# EAGLE board RJ_IGVC_Estop (EAGLE 9.3.1)
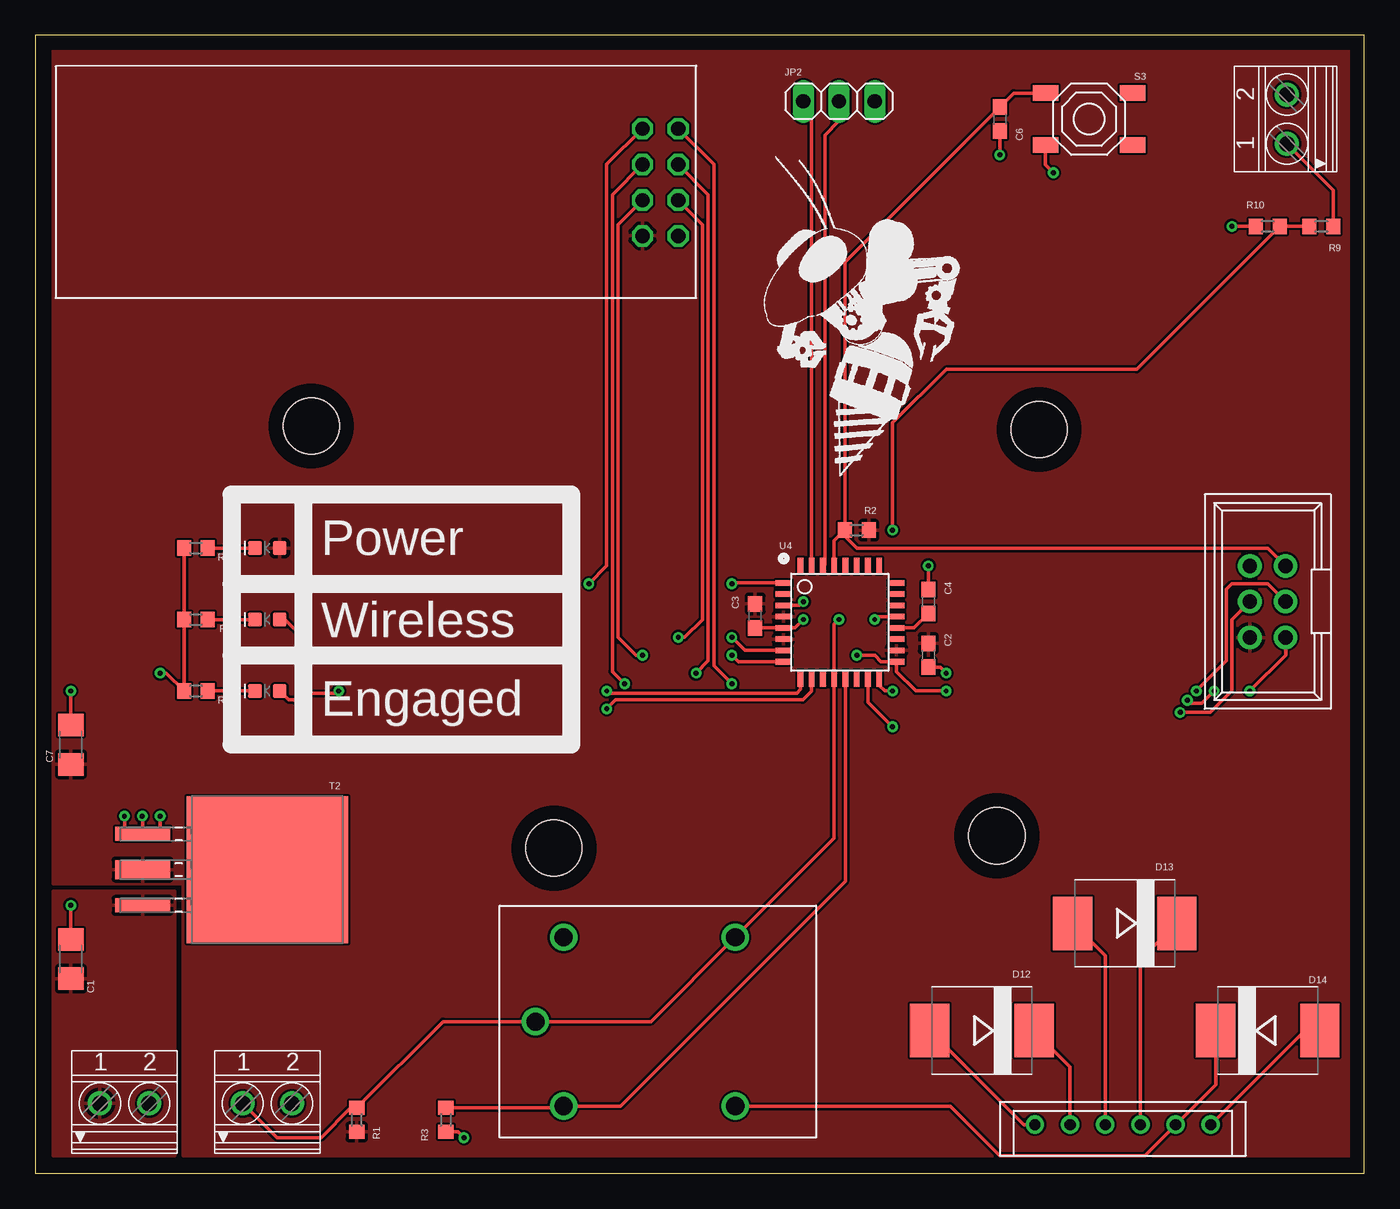
[diagram p0: board, top side]
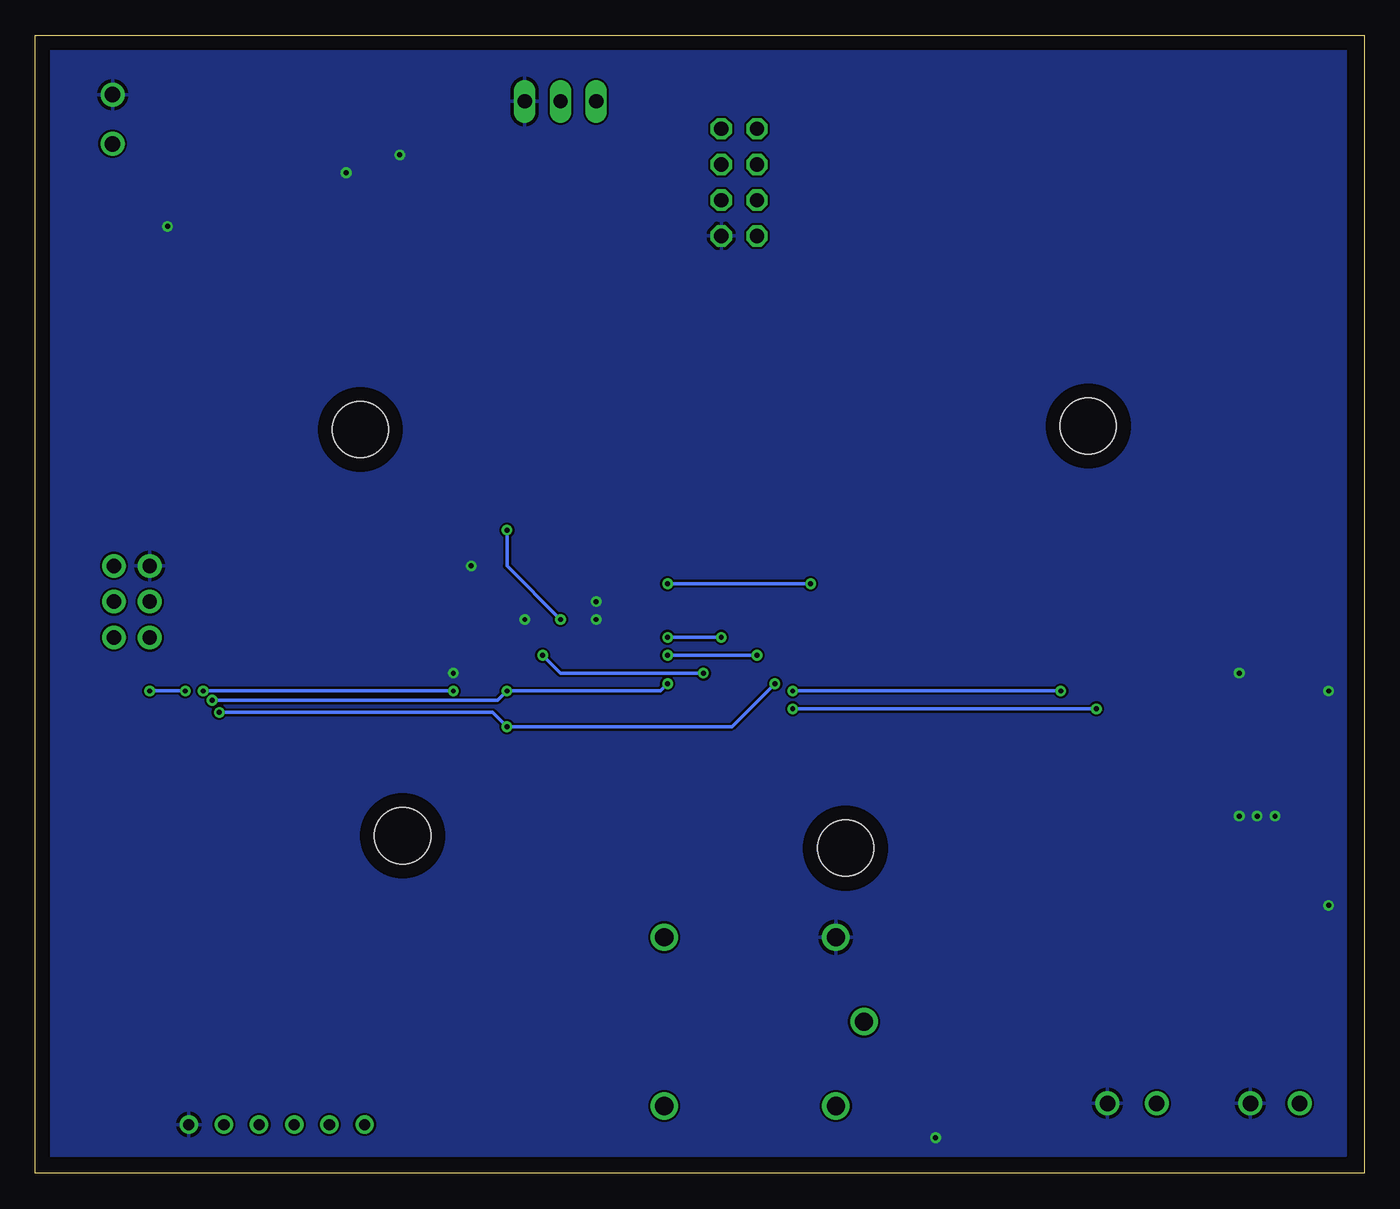
[diagram p1: board, bottom side, seen from below]

Size 94.5 x 80.9 mm. Coordinates in mm from the lower left corner, seen from the top.
Outline: 0,0 94.5,0 94.5,80.9 0,80.9 0,0
Copper layers (1*16): Top 0.035mm / dielectric 1.5mm / Bottom 0.035mm
Design rules "default *": minimum track width 6mil, minimum drill 0.35mm, track to track 6mil, track to pad 6mil, pad to pad 6mil, via to via 6mil, smd to smd 6mil, copper to edge 40mil, drill to drill 6mil, minimum pad ring 10mil, minimum via ring 8mil, stop-mask expansion 4mil, vias tented up to drill 0mil, thermal gap 10mil
Holes 4 mm at 36.88,23.12 68.38,24 19.63,53.12 71.38,52.88

## Footprints (pad centres in the part's own frame; a part is rotated, then mirrored left to right if it is on the bottom)
C1206 = smd 1.6 x 1.8: 1 -1.4,0; 2 1.4,0
C0603 = smd 1.1 x 1: 1 -0.85,0; 2 0.85,0
LED-0603 = smd 1 x 1: A -0.877,0; C 0.877,0
SMC = smd 2.8 x 3.8: A 3.7,0; C -3.7,0
1X03 = drill 1.016 long: 1 -2.54,0; 2 0,0; 3 2.54,0
2X3SHROUDED = drill 1.02 pad 1.676: !RESET -2.54,1.27; +5V 2.554,-1.27; GND -2.54,-1.27; MISO 2.54,1.27; MOSI 0,-1.27; SCK 0,1.27
R0603 = smd 1 x 1.1: 1 -0.85,0; 2 0.85,0
SW4-SMD-5.2X5.2X1.5MM = smd 1.8 x 1.1: 1 -3.1,1.85; 2 3.1,1.85; 3 3.1,-1.85; 4 -3.1,-1.85
D2PAK/A = smd 0.991 x 3.912: 1 -2.54,-8.877; 3 2.54,-8.877 | smd 1.346 x 3.912: 2 0,-8.877 | smd 10.465 x 11.455: 4 0,0
ATMEGA328P-AUR = smd 1.15 x 0.4: 1 -3.946,2.603; 2 -3.955,1.803; 3 -3.955,1.003; 4 -3.955,0.203; 5 -3.955,-0.597; 6 -3.955,-1.397; 7 -3.955,-2.197; 8 -3.955,-2.997; 17 4.085,-2.997; 18 4.085,-2.197; 19 4.085,-1.397; 20 4.085,-0.597; 21 4.085,0.203; 22 4.085,1.003; 23 4.085,1.803; 24 4.085,2.603 | smd 0.4 x 1.15: 9 -2.743,-4.21; 10 -1.943,-4.21; 11 -1.143,-4.207; 12 -0.343,-4.21; 13 0.457,-4.21; 14 1.257,-4.207; 15 2.057,-4.207; 16 2.857,-4.207; 25 2.857,3.813; 26 2.057,3.813; 27 1.257,3.813; 28 0.457,3.811; 29 -0.343,3.811; 30 -1.143,3.813; 31 -1.943,3.811; 32 -2.743,3.811
G5LE-14 = drill 1.3: P$1 4.55,14.25; P$2 16.75,14.25; P$3 4.55,2.25; P$4 2.55,8.25; P$5 16.75,2.25
1751248 = drill 1.1 pad 1.7: 1 -1.75,-0.1; 2 1.75,-0.1
NRF24L01+PA+LNA = drill 1.016 octagon: CE 21.59,-0.68; CSN 19.05,-0.68; GND 21.59,-3.22; IRQ 19.05,4.4; MISO 21.59,4.4; MOSI 19.05,1.86; SCK 21.59,1.86; VCC 19.05,-3.22
B6BEHALFSN = drill 0.8: X-1 2.5,2.2; X-2 5,2.2; X-3 7.5,2.2; X-4 10,2.2; X-5 12.5,2.2; X-6 15,2.2

## Placement (x,y rotation side)
C1  10uF  [C1206]  2.54,15.24 90 top
C2  0.1uF  [C0603]  63.5,36.83 270 top
C3  0.1uF  [C0603]  51.18,39.62 270 top
C4  0.1uF  [C0603]  63.5,40.64 90 top
C6  0.1uF  [C0603]  68.58,74.93 270 top
C7  10uF  [C1206]  2.54,30.48 90 top
D1  Green  [LED-0603]  16.51,39.37 180 top
D2  Green  [LED-0603]  16.51,44.45 180 top
D3  Green  [LED-0603]  16.51,34.29 180 top
D12  S10M-TP  [SMC]  67.31,10.16 180 top
D13  S10M-TP  [SMC]  77.47,17.78 180 top
D14  S10M-TP  [SMC]  87.63,10.16 0 top
JP2  Serial  [1X03]  57.15,76.2 0 top
PROG  ICSP Connector  [2X3SHROUDED]  87.63,40.64 270 top
R1  10k  [R0603]  22.86,3.81 90 top
R2  10k  [R0603]  58.42,45.72 0 top
R3  10k  [R0603]  29.21,3.81 90 top
R4  1k  [R0603]  11.43,39.37 0 top
R5  1k  [R0603]  11.43,44.45 0 top
R6  1k  [R0603]  11.43,34.29 0 top
R9  4.7k  [R0603]  91.44,67.31 180 top
R10  750  [R0603]  87.63,67.31 180 top
S3  SKQGADE010  [SW4-SMD-5.2X5.2X1.5MM]  74.93,74.93 0 top
T2  LD1086D2M33TR  [D2PAK/A]  16.51,21.59 270 top
U4  ATMEGA328P-AUR  [ATMEGA328P-AUR]  57.15,39.37 0 top
U$1  G5LE-14  [G5LE-14]  33.02,2.54 0 top
U$2  [ROBOBUZZ_1.2X]  57.15,49.53 0 top
X2  Power  [1751248]  6.35,5.08 0 top
X3  Button In  [1751248]  16.51,5.08 0 top
X4  E-Stop Signal In  [1751248]  88.9,74.93 90 top
X5  [NRF24L01+PA+LNA]  24.13,69.85 0 top
X6  B6B-EH-A(LF)(SN)  [B6BEHALFSN]  68.58,1.27 0 top

## Library data of the parts
C1-C4 C7 = rcl; SPICEPREFIX: C
C6 R1 R3-R6 R9 R10 = resistor
D1-D3 = SparkFun-LED; PROD_ID: DIO-09003
D12-D14 = IGVC-Discrete
JP2 = pinhead
PROG U4 = lcd-buzzer
R2 = rcl; SPICEPREFIX: R
S3 = rgb-led; MPN: SKQGADE010
T2 = transistor; MANUFACTURER_PART_NUMBER: LD1086D2M33TR; VENDOR: STMicroelectronics
U$1 = IGVC-Misc
U$2 = RoboJackets-Aesthetics
X2-X4 = con-phoenix-350; OC_FARNELL: unknown; OC_NEWARK: unknown
X5 X6 = IGVC-Connector

## Nets
!RESET: C6.1 PROG.!RESET R2.1 S3.1 U4.29
+3V3: C2.1 C3.1 C7.1 D2.A PROG.+5V R1.1 R2.2 T2.2 U4.4 U4.6 U4.18 X5.VCC
+24V: D12.A X6.X-1
BUTTON_LED: D1.A U4.9
CE: U4.7 X5.CE
CSN: U4.8 X5.CSN
DIODE_TO_GREEN: D12.C X6.X-2
DIODE_TO_INTER: D13.C X6.X-4
GND: C1.2 C2.2 C3.2 C4.2 C6.2 C7.2 D14.A JP2.3 PROG.GND R3.1 R4.1 R5.1 R6.1 R10.2 S3.4 T2.1 U4.3 U4.5 U4.21 U$1.P$1 X2.2 X3.2 X4.2 X5.GND X6.X-6
IN: R1.2 R9.2 R10.1 U4.12 U$1.P$2 U$1.P$4 X3.1
IRQ: U4.1 X5.IRQ
MISO: PROG.MISO U4.16 X5.MISO
MOSI: PROG.MOSI U4.15 X5.MOSI
MOTOR_POWER: D13.A X6.X-3
N$2: D2.C R5.2
N$3: D1.C R4.2
N$4: D3.C R6.2
N$6: R9.1 X4.1
N$9: C4.1 U4.20
OUT: R3.2 U4.13 U$1.P$3
RX: JP2.2 U4.30
SCK: PROG.SCK U4.17 X5.SCK
SOLENOID_TRIG: D14.C U$1.P$5 X6.X-5
TX: JP2.1 U4.31
V_IN: C1.1 T2.3 X2.1
WIRELESS_LED: D3.A U4.10

## Tracks (layer width: path | path; a pad name or v marks a point on that pad's centre or on a via)
!RESET
  Top 0.254: U4.29 56.81,44.96 R2.1 | R2.1 57.57,64.77 C6.1 69.58,76.78 S3.1 | R2.1 57.57,45.3 58.42,44.45 87.63,44.45 PROG.!RESET
+3V3
  pour Top: 1.27,20.57 10.54,20.57 10.54,1.27 93.98,1.27 93.98,80.01 1.27,80.01
+24V
  Top 0.254: D12.A 70.3,3.47 X6.X-1
BUTTON_LED  (via drill 0.35)
  Top 0.254: U4.9 54.41,34.4 54.15,34.15 40.78,34.15 v40.64,34.29 | D1.A 17.78,39.37 19.05,38.1 19.05,34.67 19.58,34.15 21.45,34.15 v21.59,34.29
  Bottom 0.254: v21.59,34.29 v40.64,34.29
CE  (via drill 0.35)
  Top 0.254: X5.CE 47.45,67.44 47.45,39.37 46.18,38.1 v45.72,38.1 | U4.7 50.46,37.17 v49.53,38.1
  Bottom 0.254: v49.53,38.1 v45.72,38.1
CSN  (via drill 0.35)
  Top 0.254: X5.CSN 41.45,67.44 41.45,38.1 42.72,36.83 v43.18,36.83 | U4.8 49.99,36.37 v49.53,36.83
  Bottom 0.254: v49.53,36.83 v43.18,36.83
DIODE_TO_GREEN
  Top 0.254: D12.C 73.58,7.59 X6.X-2
DIODE_TO_INTER
  Top 0.254: D13.C 78.58,15.19 X6.X-4
GND  (via drill 0.35)
  Top 0.254: v8.89,35.56 9.31,35.56 R6.1 R4.1 R5.1 | C1.2 v2.54,19.05 | 7.63,24.14 T2.1 7.63,25.4 v7.62,25.4 | C7.2 v2.54,34.29 | R3.1 30.06,2.96 v30.48,2.54 | C6.2 v68.58,72.39 | S3.4 71.83,71.68 v72.39,71.12 | R10.2 v85.09,67.31 | C2.2 64.35,35.98 v64.77,35.56 | U4.21 59.89,39.57 v59.69,39.37 | U4.3 54.34,40.37 v54.61,40.64 | v54.61,39.37 54.01,38.77 U4.5 C3.2 | v6.35,25.4 6.35,24.13 | v8.89,25.4 8.89,24.13 | X6.X-6 90.27,10.16 D14.A | C4.2 v63.5,43.18
  pour Bottom: 1.27,80.01 93.98,80.01 93.98,1.27 1.27,1.27
IN  (via drill 0.35)
  Top 0.254: X3.1 17.2,2.54 20.32,2.54 22.44,4.66 R1.2 28.99,10.79 U$1.P$4 43.77,10.79 U$1.P$2 56.81,23.83 U4.12 56.81,39.03 v57.15,39.37 | R9.2 R10.1 78.32,57.15 64.77,57.15 60.96,53.34 v60.96,45.72
  Bottom 0.254: v60.96,45.72 60.96,43.18 v57.15,39.37
IRQ  (via drill 0.35)
  Top 0.254: X5.IRQ 40.64,71.71 40.64,43.18 v39.37,41.91 | v49.53,41.91 49.59,41.97 U4.1
  Bottom 0.254: v39.37,41.91 v49.53,41.91
MISO  (via drill 0.35)
  Top 0.254: v83.82,34.29 82.96,33.43 82.12,33.43 v81.92,33.63 | v86.36,34.29 88.9,36.83 PROG.MISO | X5.MISO 48.26,71.71 48.26,36.07 v49.53,34.8 | v60.96,34.29 60.4,34.29 60.01,34.69 U4.16
  Bottom 0.254: v83.82,34.29 v86.36,34.29 | v49.53,34.8 50.04,34.29 v60.96,34.29 61.62,33.63 v81.92,33.63
MOSI  (via drill 0.35)
  Top 0.254: U4.15 59.21,33.5 v60.96,31.75 | PROG.MOSI 85.09,39.37 85.09,34.29 83.57,32.77 v81.41,32.77 | X5.MOSI 41.05,69.58 41.05,35.67 v41.91,34.8
  Bottom 0.254: v41.91,34.8 44.96,31.75 v60.96,31.75 61.98,32.77 v81.41,32.77
MOTOR_POWER
  Top 0.254: X6.X-3 76.08,15.47 D13.A
N$2
  Top 0.254: R5.2 D2.C
N$3
  Top 0.254: R4.2 D1.C
N$4
  Top 0.254: R6.2 D3.C
N$6
  Top 0.254: X4.1 92.29,69.89 R9.1
N$9
  Top 0.254: U4.20 62.48,38.77 C4.1
OUT
  Top 0.254: R3.2 37.44,4.66 U$1.P$3 41.62,4.79 57.61,20.78 U4.13
RX
  Top 0.254: JP2.2 57.15,74.8 56.13,73.79 56.13,43.31 U4.30
SCK  (via drill 0.35)
  Top 0.254: PROG.SCK 87.63,41.91 85.09,41.91 84.68,41.5 84.68,36.42 v82.55,34.29 | X5.SCK 47.85,69.58 47.85,36.42 v46.99,35.56 | v58.42,36.83 59.69,36.83 60.15,36.37 U4.17 61.23,35.67 62.61,34.29 v64.77,34.29
  Bottom 0.254: v46.99,35.56 57.15,35.56 v58.42,36.83 | v64.77,34.29 v82.55,34.29
SOLENOID_TRIG
  Top 0.254: U$1.P$5 65.06,4.79 68.58,1.27 78.88,1.27 X6.X-5 83.93,6.32 D14.C
TX
  Top 0.254: U4.31 55.21,75.6 JP2.1
V_IN
  pour Top: 1.27,20.07 9.91,20.07 9.91,1.27 1.27,1.27
WIRELESS_LED  (via drill 0.35)
  Top 0.254: D3.A 18.02,33.66 18.41,33.66 v19.05,33.02 | U4.10 55.21,34.28 54.58,33.66 41.27,33.66 v40.64,33.02
  Bottom 0.254: v40.64,33.02 v19.05,33.02

## Text on the board
tPlace: Power | Wireless | Engaged
tValues: IGVC E-Stop Board / v1.1